# Altium PCB EIS_Inverting_Adapter.PcbDoc
Units mil, origin at the board's own origin, x right, y up, seen from the top; angles counter-clockwise.
Board outline 1120 x 700 mil, 2 copper layers (Top Layer, Bottom Layer); 8 components, 8 nets, 30 pads, 0 vias.
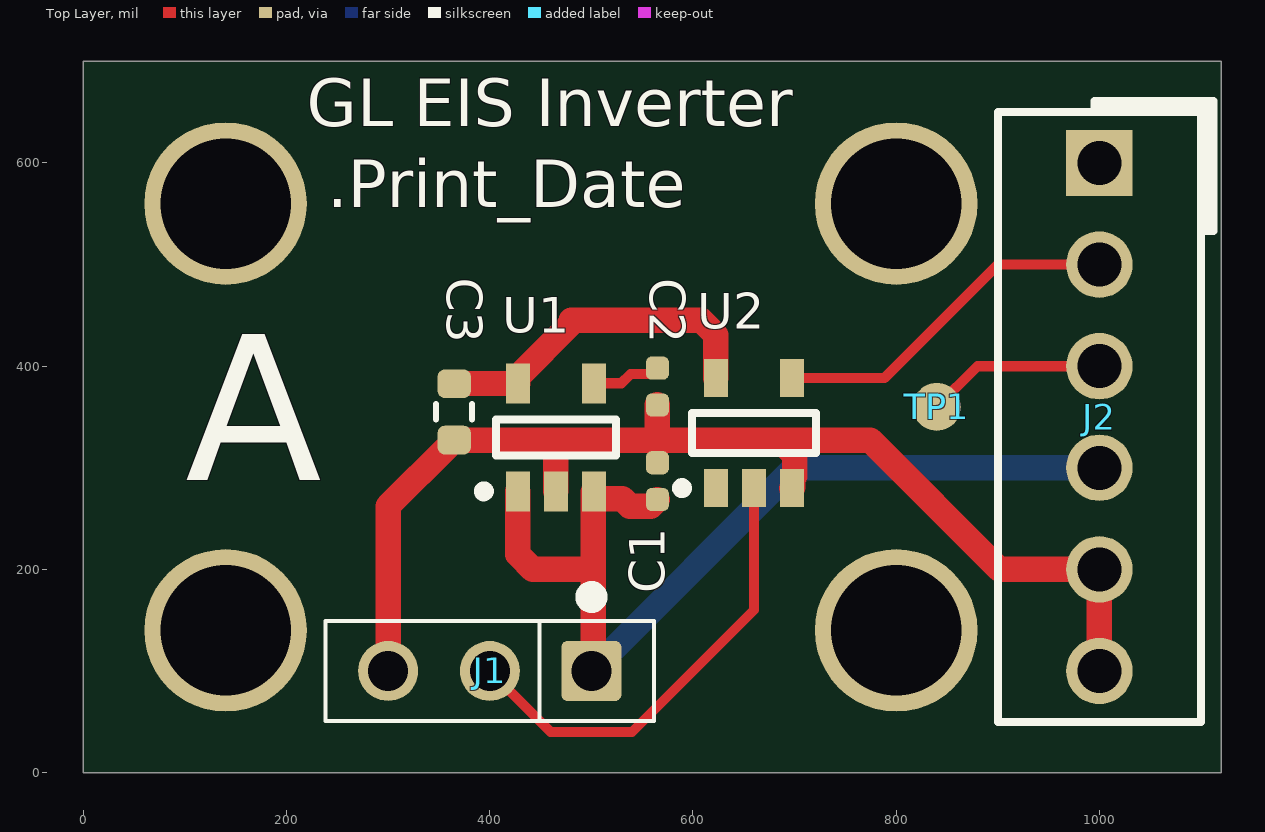
[diagram p0: Top Layer view]
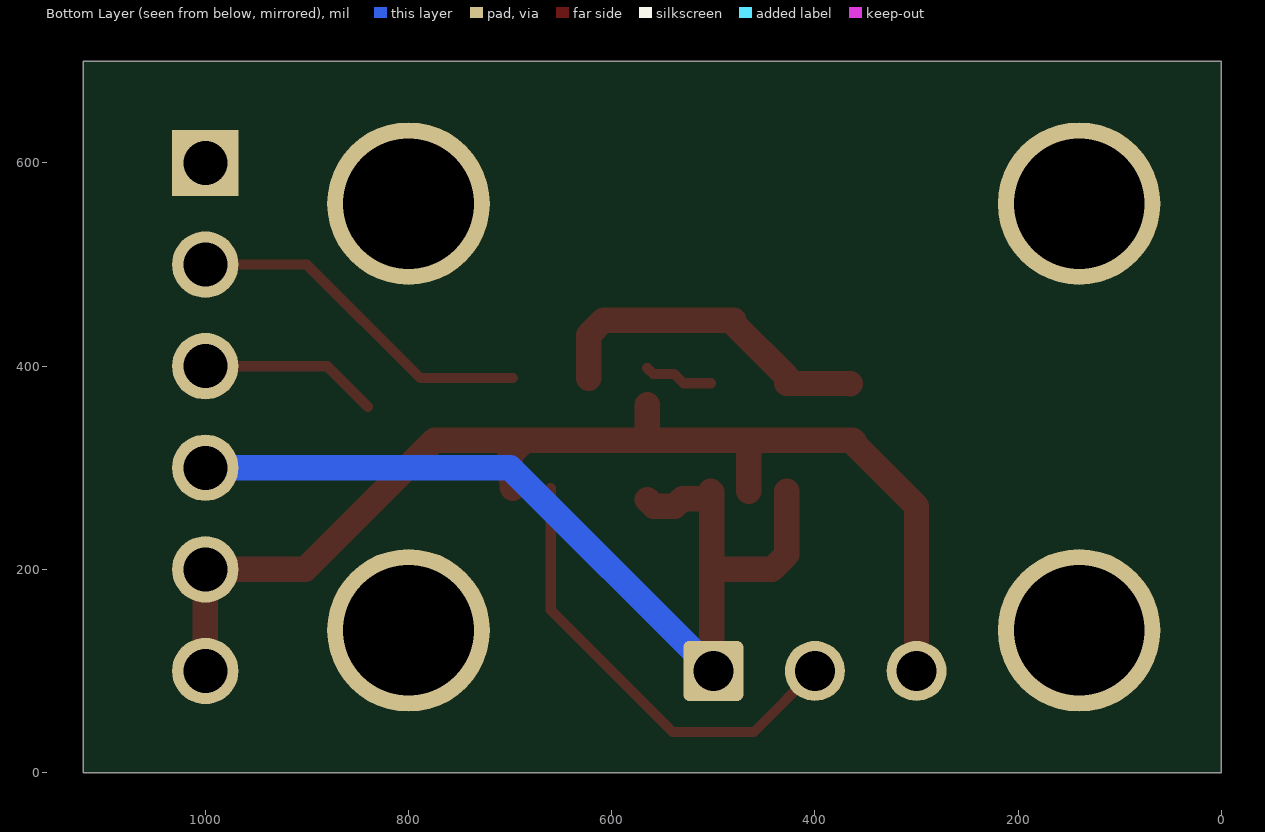
[diagram p1: Bottom Layer view, seen from below]
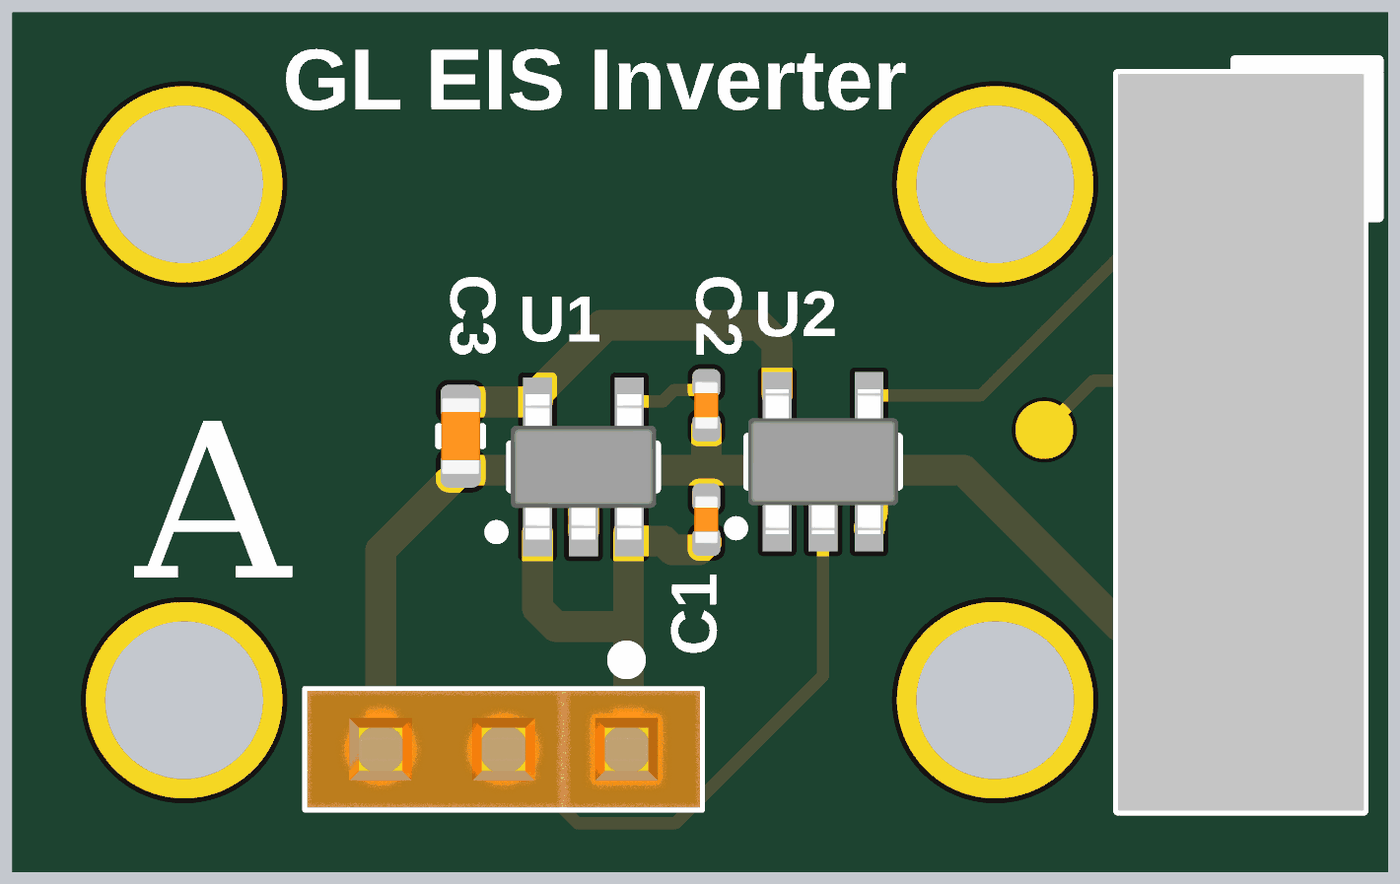
[diagram p2: 3D render of the assembled board from above, using the file's embedded part models]

## Layer stack, top to bottom
Top Solder: solder mask 0.4, Solder Resist, Dk 3.5
Top Layer: signal copper 1.4
Dielectric 1: dielectric 12.6, FR-4, Dk 4.8
Bottom Layer: signal copper 1.4
Bottom Solder: solder mask 0.4, Solder Resist, Dk 3.5

## Board outline
0,0 1120,0 1120,700 0,700

## Design rules (kind name [scope] priority, off if disabled: settings)
Clearance [All] p1: gap=10 ignorepadtopadclearanceinfootprint=FALSE except(0: Arc-Hole Track-Hole SMDPad-Hole THPad-Hole Via-Hole Fill-Hole Poly-Hole Region-Hole Text-Hole)
HoleSize [All] p1: absolutevalues=TRUE maxlimit=500 minlimit=1 maxpercent=80.000 minpercent=20.000
MinimumSolderMaskSliver [All] p1: minsoldermaskwidth=2
PolygonConnect [All] p1: connectstyle=Relief reliefconductorwidth=10 reliefentries=4 polygonreliefangle="90 Angle" airgapwidth=10
RoutingVias [All] p1: holewidth=28 width=50 viastyle="Through Hole" minholewidth=28 minwidth=50 maxholewidth=28 maxwidth=50
SilkToSolderMaskClearance [IsPad] p1: minsilkscreentomaskgap=2 clearancetoexposedcopper=TRUE
SolderMaskExpansion [All] p1: expansion=4 istentingtop=FALSE
Width [All] p1: maxlimit=50 minlimit=8 preferedwidth=10
27 further rules are at their usual default settings.

## Components (designator, comment, footprint, x,y, rotation, side; value= is the part's Value field where it differs from the comment)
C1 "E-GCA-0060" CAPC1005X55N 565,286.89 r90 top
C2 "E-CAP-0253" CAPC1005X55N 565,380 r270 top
C3 "E-CAP-0056" CAPC1608X90L 365,355 r270 top
J1 "E-CON-0138" SKT2P54_2P41X8X8P51_03 500,100 r180 top
J2 "E-CON-0064" SIP508W63P254L1524H1041Q6 1000,350 r270 top
TP1 "MFG-0037" TP_1.2mm_PAD_NOSILK 840,360 r90 top
U1 "MIC5205" SOT95P280X145-5N 465,330 r90 top
U2 "5.5V Tolerant Input" SOT95P280X125-5N 660,334.13 r90 top

## Footprints (in the part's own frame and the unit in brackets; to place one, negate y for a bottom-side part, rotate by r counter-clockwise, add the part's x,y. Pads: shape width x height; smd on the part's side, far side on the other; paste and mask are expansions set on the pad)
CAPC1005X55N [mm] "Capacitor, Chip; 1.00 mm L X 0.50 mm W X 0.55 mm H body"
  rrect52% 0.58x0.58 smd: 1(-0.46,0) 2(0.46,0)
  body extent -0.5,-0.25 0.5,0.25, height 0.55
CAPC1608X90L [mm] "Capacitor, Chip; 1.60 mm L X 0.80 mm W X 0.90 mm H body"
  rrect50% 0.72x0.83 smd: 1(-0.705,0) 2(0.705,0)
  silkscreen extent -0.2,-0.45 0.2,0.45, body extent -0.8,-0.4 0.8,0.4, height 0.9
SIP508W63P254L1524H1041Q6 [mil] "SIP, 0.100 in pitch; 6 pin, 0.600 in L X 0.200 in W X 0.410 in H body"
  rect 65.4x65.4 / inner round 65.4 / far side rect 65.4x65.4 hole 43.3 paste-65.4: 1(-250,0)
  round 65.4 hole 43.3 paste-65.4: 2(-150,0) 3(-50,0) 4(50,0) 5(150,0) 6(250,0)
  silkscreen extent -311,-100 300,112, body extent -300,-100 300,100, height 395
SKT2P54_2P41X8X8P51_03 [mm] "3 PIN SOCKET"
  rrect20% 1.5x1.5 hole 1: 1(0,0)
  round 1.5 hole 1: 2(2.54,0) 3(5.08,0)
  silkscreen extent -1.57,-2.05 6.65,1.25, body extent -1.52,-1.2 6.6,1.21, height 8.52
SOT95P280X125-5N [mm] "SOT23, 5-Leads, Body 2.90x2.80mm, Pitch 0.95mm, IPC Medium Density"
  rect 0.95x0.6 smd: 1(-1.375,0.95) 2(-1.375,0) 3(-1.375,-0.95) 4(1.375,-0.95) 5(1.375,0.95)
  silkscreen extent -1.5,-1.55 0.5,1.92, body extent -1.5,-1.55 1.5,1.55, height 1.25
SOT95P280X145-5N [mm] "SOT23, 5-Leads, Body 2.90x2.80mm, Pitch 0.95mm, IPC Medium Density"
  rect 1x0.6 smd: 1(-1.35,0.95) 2(-1.35,0) 3(-1.35,-0.95) 4(1.35,-0.95) 5(1.35,0.95)
  silkscreen extent -1.47,-1.5 0.45,1.92, body extent -1.5,-1.5 1.5,1.5, height 1.45
TP_1.2mm_PAD_NOSILK [mm]
  round 1.2 smd paste-1 mask+0.075: 1(0,0)

## Part data
C1: library part CMP-002-0003-28, "CAP GENERIC, CER, 1uF, 25V, 10%, X5R, 0402i/1005m", Capacitance=1uF, Dielectric Material=X5R, Manufacturer="SQUARE AVL", Manufacturer Part Number=GENERIC, Package/Case=1005M/0402I, Tolerance=±10%, Voltage=25V, Height (Max)=0.55mm, Imperial Size=0402, PLM Lifecycle=Design, Square Part Number=E-GCA-0060, TQM Critical CI=Unassigned
C2: library part CMP-002-0132-29, "CAP, CER, 470pF, 50V, 5%, X7R, 0402 (1005m)", Capacitance=470pF, Dielectric Material=X7R, Manufacturer="Murata Electronics North America", Manufacturer Part Number=GRM155R71H471JA01D, Operating Temperature="-55°C ~ 125°C", Package/Case=1005m/0402i, Supplier Part Number=490-6362-2-ND, Tolerance=±5%, Voltage=50V, ComponentLink1Description=Datasheet, ComponentLink1URL=https://www.murata.com/~/media/webrenewal/support/library/catalog/products/capacitor/mlcc/c02e.ashx?la=en-us, ComponentLinkDescription=Datasheet, ComponentLinkURL=https://www.murata.com/~/media/webrenewal/support/library/catalog/products/capacitor/mlcc/c02e.ashx?la=en-us, Height (Max)=0.55mm, Imperial Size=0402, PLM Lifecycle="In Production", Square Part Number=E-CAP-0253, Supplier=Digi-Key, TQM Critical CI=Unassigned
C3: library part CMP-002-0258-23, "CAP CER 2.2UF 16V 10% X5R 0603 (1608m)", Capacitance=2.2uF, Dielectric Material=X5R, Manufacturer="Murata Electronics North America", Manufacturer Part Number=GRM188R61C225KE15D, Operating Temperature="-55°C ~ 85°C", Package/Case=1608m/0603i, Supplier Part Number=490-3296-1-ND, Tolerance=10%, Voltage=16V, ComponentLink1Description=Datasheet, ComponentLink1URL=https://www.murata.com/~/media/webrenewal/support/library/catalog/products/capacitor/mlcc/c02e.ashx?la=en-us, ComponentLinkDescription=Datasheet, ComponentLinkURL=https://www.murata.com/~/media/webrenewal/support/library/catalog/products/capacitor/mlcc/c02e.ashx?la=en-us, Height (Max)=0.90mm, Imperial Size=0603, PLM Lifecycle=Design, Square Part Number=E-CAP-0056, Supplier=Digi-Key, TQM Critical CI=Unassigned
J1: library part CMP-004-0057-08, "CONN RCPT .100\" 3POS SNGL GOLD", Current - Rated="5.7 A", Manufacturer="Samtec Inc", Manufacturer Part Number=SSW-103-01-S-S, Operating Temperature="-55°C ~ 125°C", Supplier Part Number=SAM1211-03-ND, Category=Header, ComponentLink1Description=Datasheet, ComponentLink1URL=http://suddendocs.samtec.com/prints/ssw-1xx-xx-xxx-x-xx-xxx-xx-mkt.pdf, ComponentLinkDescription=Datasheet, ComponentLinkURL=http://suddendocs.samtec.com/prints/ssw-1xx-xx-xxx-x-xx-xxx-xx-mkt.pdf, Height (Max)="0.335\" (8.51 mm)", Mounting Type="Through Hole", Number of Positions=3, Number of Rows=1, Orientation=Vertical, Pitch (Interface)="0.100\" (2.54 mm)", Square Part Number=E-CON-0138, Supplier=Digi-Key, TQM Critical CI=Unassigned, Type=Receptacle
J2: library part CMP-004-0189-03, "CONN HEADER VERT 6POS .100 TIN", Manufacturer="TE Connectivity AMP Connectors", Manufacturer Part Number=640452-6, Supplier Part Number=A1913-ND, Category="header, male", ComponentLinkDescription=Datasheet, ComponentLinkURL=https://www.te.com/commerce/DocumentDelivery/DDEController?Action=srchrtrv&DocNm=640452&DocType=Customer+Drawing&DocLang=English, Number of Positions=6, Pitch (Interface)=2.54mm, Square Part Number=E-CON-0064, Supplier=Digikey, TQM Critical CI=Unassigned
TP1: library part CMP-027-0041-01, "Test Point - SM, 1.2mm", ClassName=SM_TP, Hole Diameter=0, Pad Size=1.2mm, Square Part Number=MFG-0037, TQM Critical CI=Unassigned
U1: library part ICS-LRG-0001, "Linear Voltage Regulator IC Positive Fixed 1 Output 150mA SOT-23-5", Current - Output=150mA, Current - Quiescent (Iq)="150 µA", Current - Supply (Max)="2.5 mA", Manufacturer 1="Microchip Technology", Manufacturer Part Number 1=MIC5205-3.3YM5-TR, Operating Temperature="`	 / -40°C ~ 125°C", Package / Case="SC74A, SOT-753", Supplier Device Package=SOT-23-5, Supplier Part Number 1=576-1259-1-ND, Voltage - Input (Max)=16V, Voltage - Output (Max)=-, Voltage - Output (Min/Fixed)=3.3V, Voltage Dropout (Max)="0.35V @ 150mA", Base Product Number=MIC5205, Control Features=Enable, Mounting Type="Surface Mount", Number of Regulators=1, Output Configuration=Positive, Output Type1=Fixed, Protection Features="Over Current, Over Temperature, Reverse Polarity", PSRR="75dB (100Hz)", Supplier 1=Digi-Key, Supplier Link 1=https://www.digikey.com/en/products/detail/microchip-technology/MIC5205-3-3YM5-TR/771728, TPN=ICS-LRG-0001
U2: library part ICS-GAT-0001, "Automotive Single Inverter", Current - Output High, Low="32mA, 32mA", Current - Quiescent (Max)="10 µA", Manufacturer 1="Rohm Semiconductor", Manufacturer Part Number 1=BD7LS04G-CTL, Operating Temperature="`-40°C ~ 125°C", Package/Case="SC-74A, SOT-753", Supplier Device Package=5-SSOP, Supplier Part Number 1=846-BD7LS04G-CTLCT-ND, Voltage - Supply="1.65V ~ 5.5V", Height - Seated (Max)=1.25mm, Input Logic Level - High=-, Input Logic Level - Low=-, Logic Type=Inverter, Max Propagation Delay @ V, Max CL="10ns @ 5V, 50pF", Mounting Type="Surface Mount", Supplier 1=Digi-Key, Supplier Link 1=https://www.digikey.com/en/products/detail/rohm-semiconductor/BD7LS04G-CTL/16284177, TPN=ICS-GAT-0001

## Free pads (board coordinates)
  round 160 hole 128.5: 3(140,140) 3(140,560) 3(800,140) 3(800,560)

## Nets (pads, with @x,y where several pads share a name; then routed paths per layer and width w, separated by ;. In a path a pad name is that pad's centre, name@x,y a point inside that pad or via, vN(x,y) a via of type N, cw(c..) or ccw(c..) an arc to the next point about the centre after c; other vN are vias at no path point)
3V3: C3.1 U1.5 U2.5 | length 337.8
  Top Layer w25: C3.1 365.2,382.95 427.4,382.95 U1.5 427.6,389.65 480,442.05 480,445.36 607.95,445.36 622.6,430.71 U2.5
12V0: C1.1 J1.1 J2.4 U1.1 U1.3 | length 978.2
  Top Layer w25: U1.1 427.6,214.64 442.24,200 501.71,200 ; J1.1 501.71,101.71 501.71,200 ; C1.1 558.47,262.25 537.75,262.25 530.33,269.67 503.09,269.67 502.4,270.35 U1.3 501.71,276.16 501.71,200
  Bottom Layer w25: J1.1 700,300 J2.4
DTR: J2.1
GND: C1.2 C2.2 C3.2 J1.3 J2.5 J2.6 U1.2 U2.3 | length 1183.9
  Top Layer w25: J1.3 300,262.24 361.16,323.41 361.16,325.57 362.83,327.24 C3.2 461.9,327.24 ; U1.2 465,324.14 461.9,327.24 ; C2.2 565,327.24 ; U2.3 698.09,280.69 698.09,289.98 700,291.89 700,312.6 685.36,327.24 ; J2.6 J2.5 901.69,200 774.45,327.24 685.36,327.24 ; 461.9,327.24 565,327.24 ; 565,327.24 685.36,327.24
NetC2_1: C2.1 U1.4 | length 68.8
  Top Layer w10: U1.4 529.37,383.15 538.58,392.36 559.25,392.36 C2.1
NetJ1_2: J1.2 U2.2 | length 454.6
  Top Layer w10: J1.2 460,40 540,40 660,160 U2.2
RXI_INV_3V3: J2.2 U2.4 | length 348.9
  Top Layer w10: U2.4 788.27,388.27 900,500 J2.2
TXD_NC: J2.3 TP1.1 | length 176.6
  Top Layer w10: TP1.1 880,400 J2.3
pads on no net: U2.1

## Silkscreen, mask and mechanical layers (free items; w line width, h text height)
Top Overlay:
  text "GL EIS Inverter" at 220,620.94 h80
  text ".Print_Date" at 240,540.94 h80
  text "A" at 100.17,240 h250
Mechanical 1:
  the board outline again, w7.87